# Altium PCB PCB1.PcbDoc
Units mil, origin at the board's own origin, x right, y up, seen from the top; angles counter-clockwise.
Board outline 6000 x 4000 mil, 2 copper layers (Top Layer, Bottom Layer); 11 components, 7 nets, 55 pads, 0 vias.
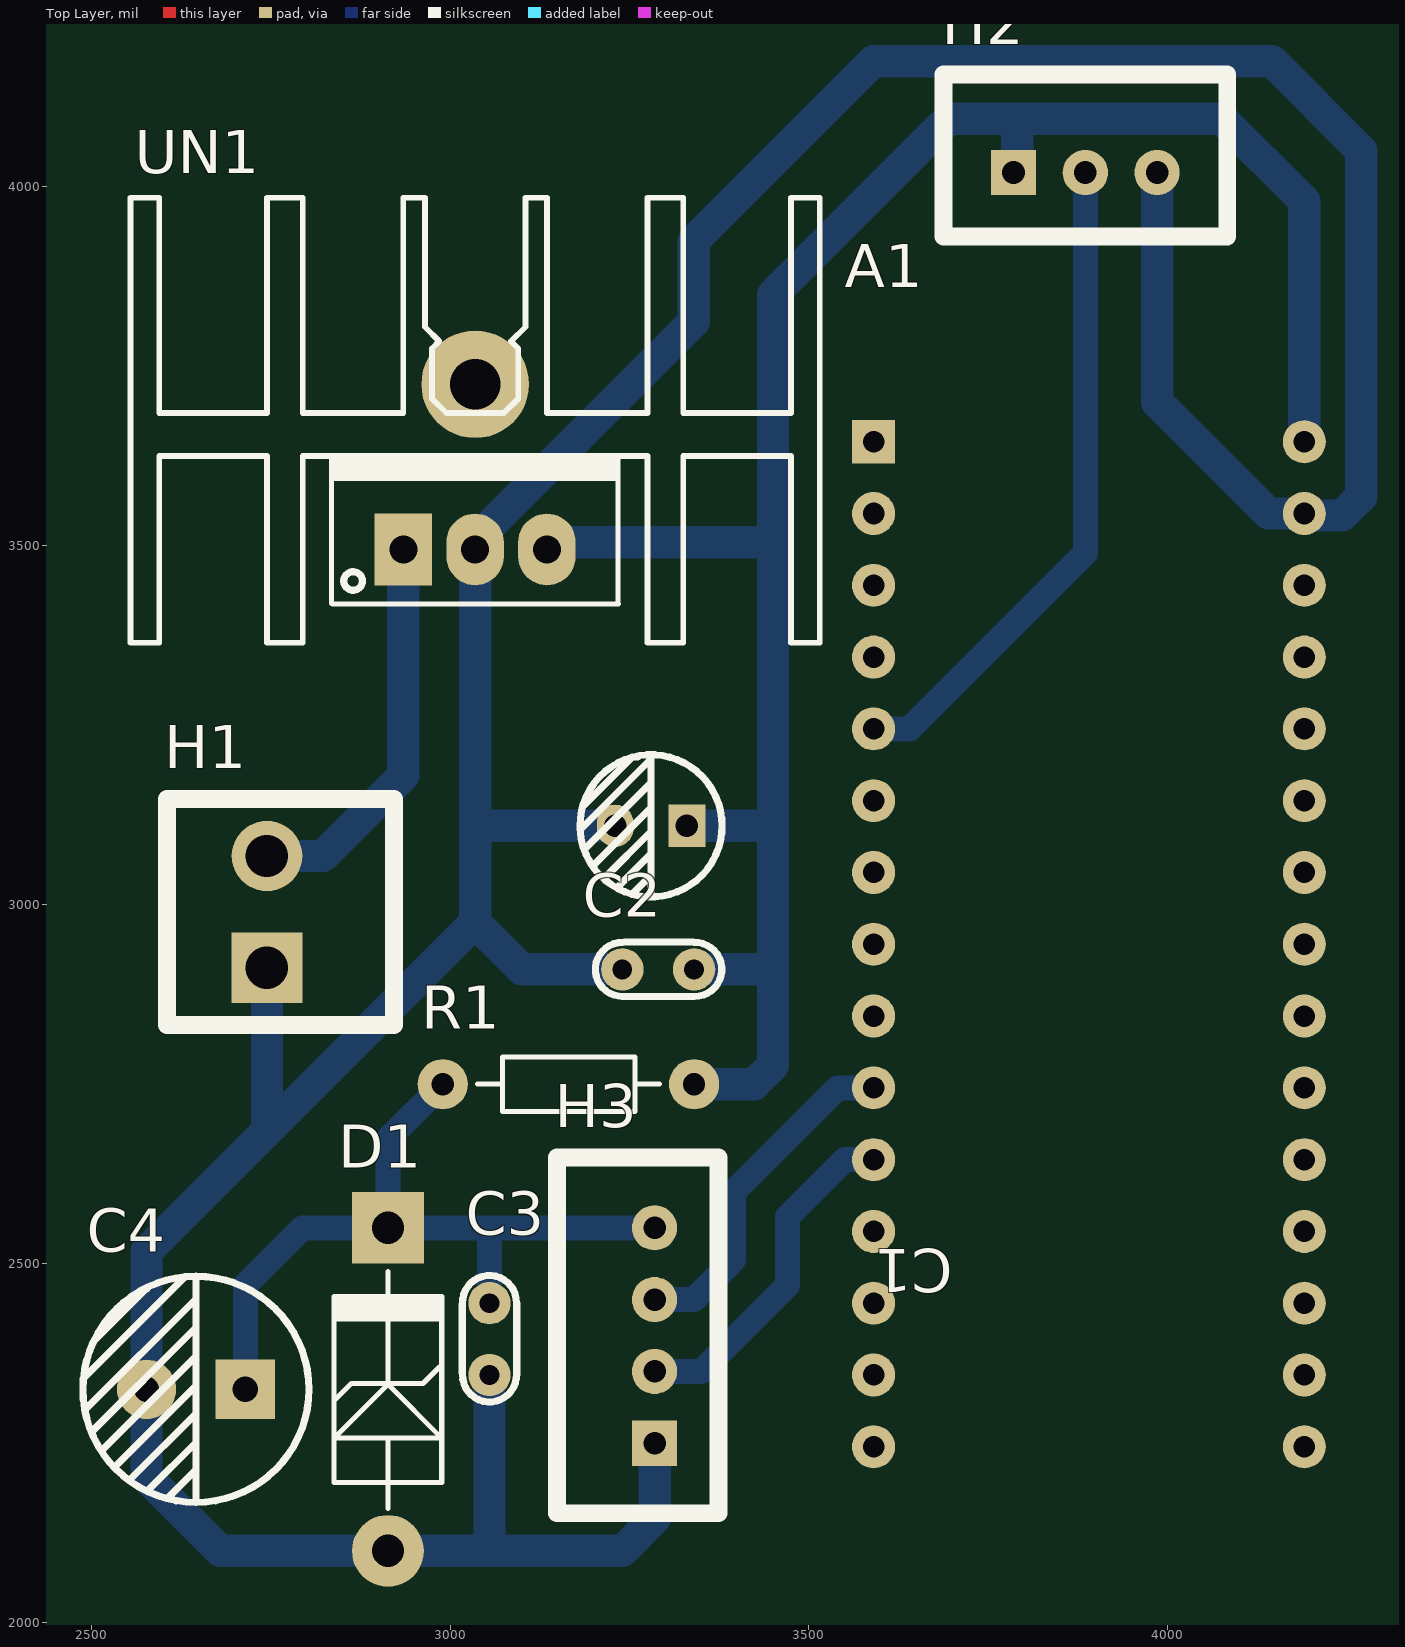
[diagram p0: Top Layer view]
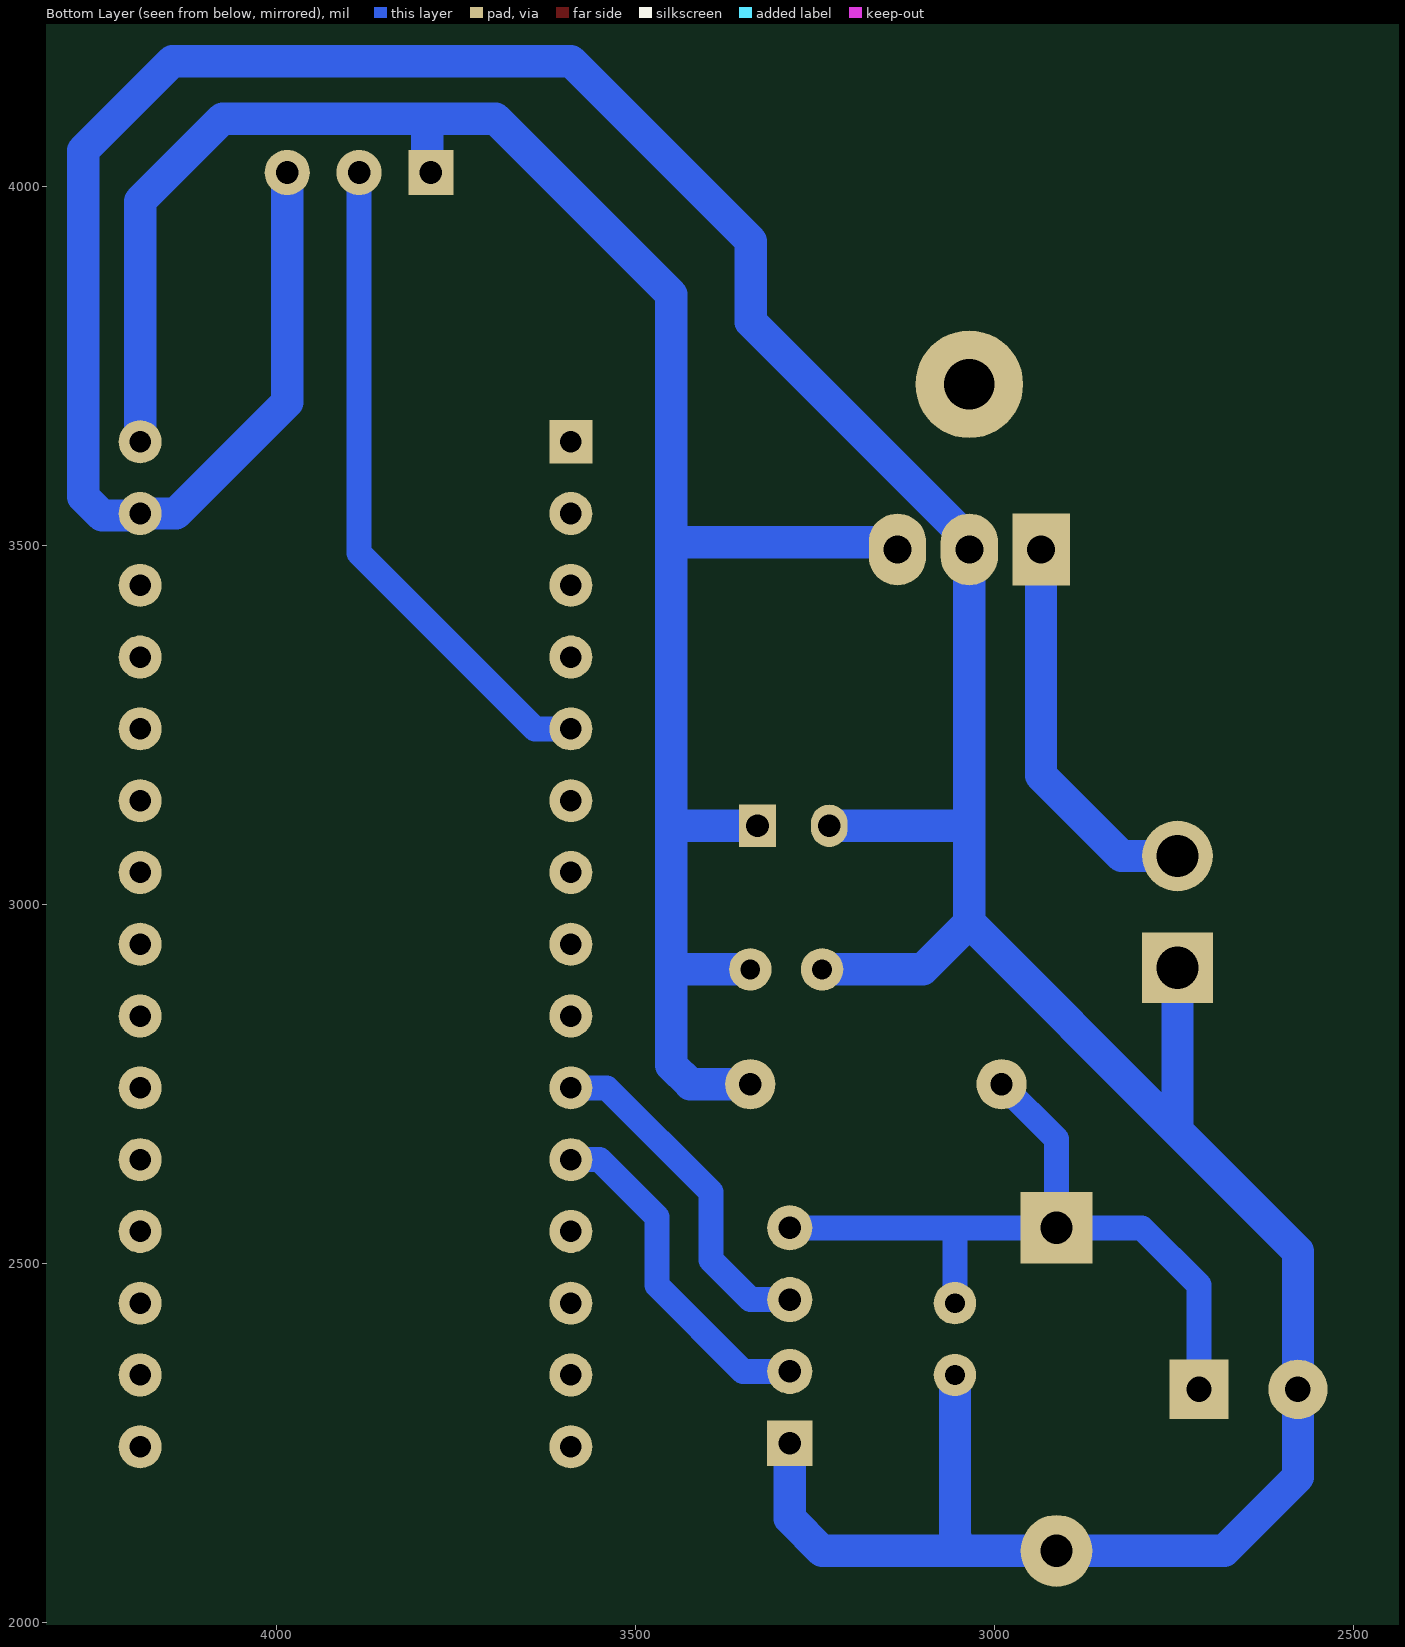
[diagram p1: Bottom Layer view, seen from below]
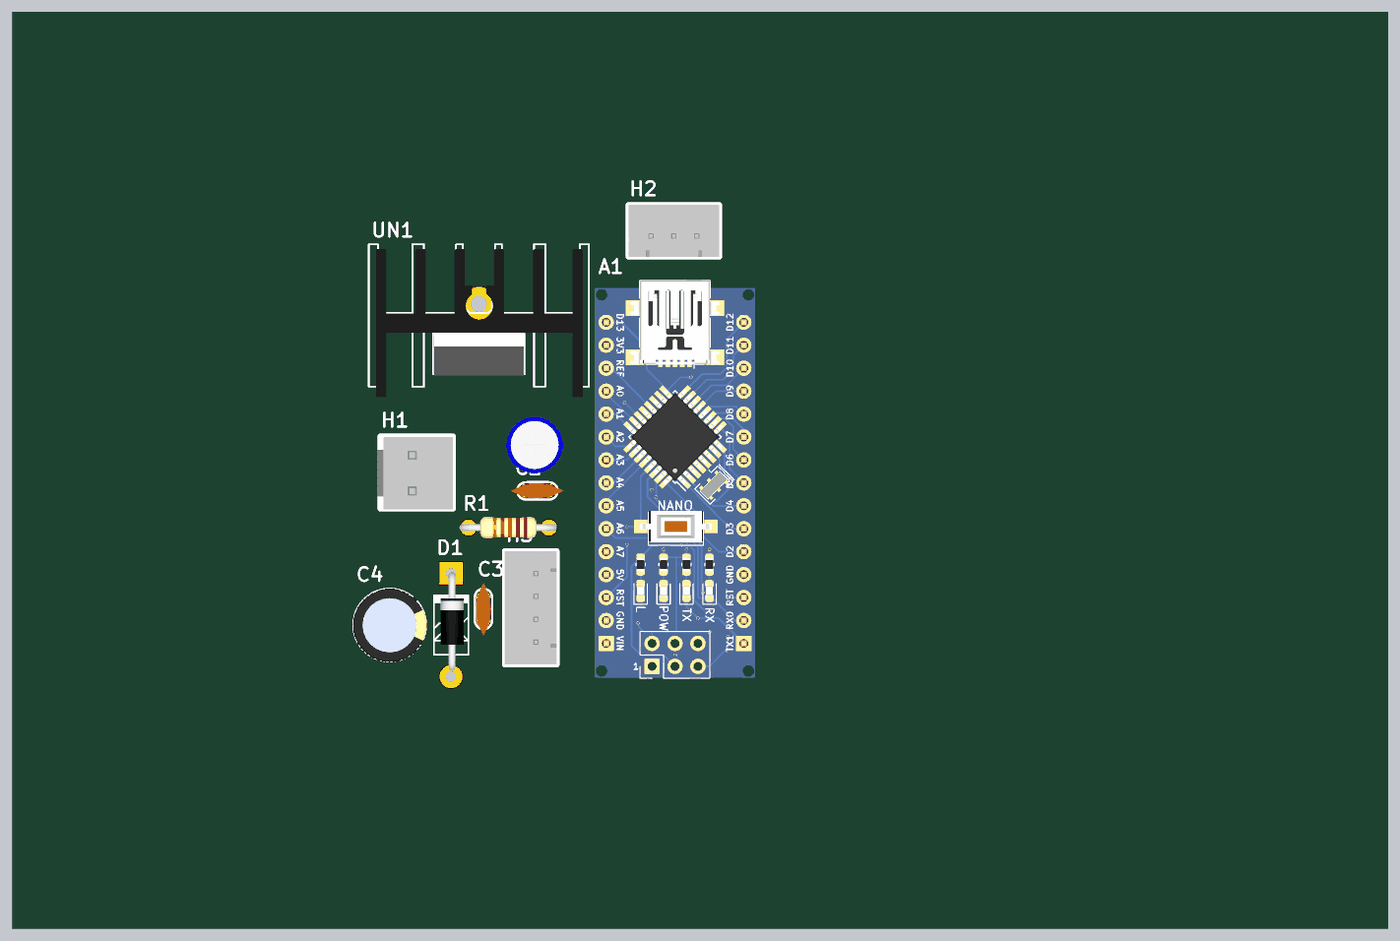
[diagram p2: 3D render of the assembled board from above, using the file's embedded part models]

## Layer stack, top to bottom
Top Solder: solder mask 0.4, Solder Resist, Dk 3.5
Top Layer: signal copper 1.4
Dielectric 1: dielectric 12.6, FR-4, Dk 4.8
Bottom Layer: signal copper 1.4
Bottom Solder: solder mask 0.4, Solder Resist, Dk 3.5

## Board outline
1000,1000 7000,1000 7000,5000 1000,5000

## Design rules (kind name [scope] priority, off if disabled: settings)
Clearance [All] p1: gap=10 ignorepadtopadclearanceinfootprint=FALSE except(0: Arc-Hole Track-Hole SMDPad-Hole THPad-Hole Via-Hole Fill-Hole Poly-Hole Region-Hole Text-Hole)
PolygonConnect [All] p1: connectstyle=Relief reliefconductorwidth=10 reliefentries=4 polygonreliefangle="90 Angle" airgapwidth=10
RoutingVias [All] p1: holewidth=28 width=50 viastyle="Through Hole" minholewidth=28 minwidth=50 maxholewidth=28 maxwidth=50
SolderMaskExpansion [All] p1: expansion=4
Width GND [InNet('GND')] p1: maxlimit=55 minlimit=45 preferedwidth=50
Width VCC [InNet('+5')] p2: maxlimit=55 minlimit=45 preferedwidth=50
Width net [All] p3: maxlimit=45 minlimit=35 preferedwidth=40
Width [All] p4: maxlimit=10 minlimit=10 preferedwidth=10
30 further rules are at their usual default settings.

## Components (designator, comment, footprint, x,y, rotation, side; value= is the part's Value field where it differs from the comment)
A1 "Nano" "Arduino nano" 3530,3805 r270 top
C1 "100uF" "tu hoa 5mm" 3280,3110 r180 top
C2 "103" "tu gom" 3290,2910 r180 top
C3 "103" "tu gom" 3055,2395 r270 top
C4 "4.7uF" "tu hoa 8mm" 2646.1,2325 r180 top
D1 "3V3" DZ2A 2913.49,2550 r270 top value=3v3
H1 "Header 2P VH3.96 Duc Thang" VH3.96M-2 2745,2990 r90 top
H2 "Header 3P 2.54 Duc Thang" XH2.54M-3 3785,4020 r0 top
H3 "CC2530" XH2.54M-4 3285,2250 r90 top
R1 "Res1" R1/4W 2990,2750 r0 top value=1K
UN1 "L78M05CP" QTO-220H2 3035,3495 r0 top

## Footprints (in the part's own frame and the unit in brackets; to place one, negate y for a bottom-side part, rotate by r counter-clockwise, add the part's x,y. Pads: shape width x height; smd on the part's side, far side on the other; paste and mask are expansions set on the pad)
"Arduino nano" [mil] "arduino nano"
  rect 60x60 hole 30: 0(160,60)
  round 60 hole 30: 1(260,60) 2(360,60) 3(460,60) 4(560,60) 5(660,60) 6(760,60) 7(860,60) 8(960,60) 9(1060,60) 10(1160,60) 11(1260,60) 12(1360,60) 13(1460,60) 14(1560,60) 15(1560,660) 16(1460,660) 17(1360,660) 18(1260,660) 19(1160,660) 20(1060,660) 21(960,660) 22(860,660) 23(760,660) 24(660,660) 25(560,660) 26(460,660) 27(360,660) 28(260,660) 29(160,660)
  body extent -25,10 1715,710, height 507
DZ2A [mil] "Diode 2A, W 150mil, L 450mil"
  round 100 hole 45: 1(450,0)
  rect 100x100 hole 45: 2(0,0)
  silkscreen extent 61,-75 391,75, body extent -5,-46 425,55, height 100
QTO-220H2 [mil] "TO-220 - 1-2-3"
  round 150 hole 70: 0(0,230)
  rect 80x100 hole 39: 1(-100,0)
  oval 80x100 hole 39: 2(0,0) 3(100,0)
  silkscreen extent -480,-130 480,490, body extent -449,-177 453,469, height 1206
R1/4W [mil] "R 1/4W, 2 Pin, 350mil"
  round 70 hole 31: 1(0,0) 2(350,0)
  silkscreen extent 48,-38 302,38, body extent -40,-47 386,47, height 111
"tu gom" [mm] "Tu gom mini"
  round 1.5 hole 0.7: 1(-1.27,0) 2(1.27,0)
  silkscreen extent -2.25,-0.97 2.22,0.97, body extent -2.92,-0.85 2.92,0.85, height 6.12
"tu hoa 5mm" [mm]
  rect 1.3x1.5 hole 0.8: 1(-1.27,0)
  oval 1.3x1.5 hole 0.8: 2(1.27,0)
  silkscreen extent -2.51,-2.51 2.51,2.51, body extent -3.12,-3.18 3.23,3.18, height 14.55
"tu hoa 8mm" [mm]
  rect 2.1x2.1 hole 0.9: 1(-1.75,0)
  round 2.1 hole 0.9: 2(1.75,0)
  silkscreen extent -4,-4 4,4, body extent -4.1,-4.07 4.1,4.13, height 13.81
VH3.96M-2 [mm]
  rect 2.5x2.5 hole 1.5: 1(-1.98,0)
  round 2.5 hole 1.5: 2(1.98,0)
  silkscreen extent -4,-4.5 4,3.54, body extent -4.08,-4.49 3.96,3.88, height 10.26
XH2.54M-3 [mm]
  rect 1.6x1.6 hole 0.8: 1(0,0)
  round 1.6 hole 0.8: 2(2.54,0) 3(5.08,0)
  silkscreen extent -2.48,-2.26 7.56,3.46, body extent -2.48,-2.26 7.56,3.48, height 6.91
XH2.54M-4 [mm]
  rect 1.6x1.6 hole 0.8: 1(0,0)
  round 1.6 hole 0.8: 2(2.54,0) 3(5.08,0) 4(7.62,0)
  silkscreen extent -2.48,-2.26 10.1,3.46, body extent -2.48,-2.26 10.1,3.48, height 6.91

## Part data
A1: library part "Arduino Nano"
C1: library part "Tu Hoa 100uF 16V 5x7", "C?m", Chung_Loai=C?m, Don_Vi=Con, Ma_Hang=MH001347, So_Chan=2, Ten_Linh_Kien="T? Hóa 100uF 16V 5x7MM"
C2 C3: library part "Tu gom 103 50V", "C?m", Chung_Loai=C?m, Don_Vi=Con, Ma_Hang=MH000936, So_Chan=2, Ten_Linh_Kien="T? g?m 103 10nF 50V"
C4: library part "Tu Hoa 4.7uF 400V 8x12", "C?m", Chung_Loai=C?m, Don_Vi=Con, Ma_Hang=MH003744, So_Chan=2, Ten_Linh_Kien="T? Hóa 4.7uF 400V 8x12MM"
D1: library part DZ, "Diode Zenner"
H1 H2: "C?m", Chung_Loai=C?m, Don_Vi=Con
  H1: Ma_Hang=MH001283, Ten_Linh_Kien="Header 2P XH2.54-2P Ð?c Th?ng"
  H2: Ma_Hang=MH001292, Ten_Linh_Kien="Header 3P XH2.54-3P Ð?c Th?ng"
H3: library part "Header 4P 2.54 Duc Thang", "C?m", Chung_Loai=C?m, Don_Vi=Con, Ma_Hang=MH001285, Ten_Linh_Kien="Header 4P XH2.54-4P Ð?c Th?ng"
R1: library part Res1_4, "Resistor", Manufacturer="Generic Components", Class=Passive, Published=08/06/2000, Publisher="Altium Hobart Technology Centre", SubClass=Resistor
UN1: "Positive Voltage Regulator", ComponentLink1Description="Manufacturer Link", ComponentLink1URL=http://www.st.com/, ComponentLink2Description=Datasheet, ComponentLink2URL=http://www.st.com/stonline/products/literature/ds/2146/l78m05c.pdf, DatasheetVersion=Apr-1994, LatestRevisionDate=17-Jul-2002, LatestRevisionNote="Re-released for DXP Platform.", Note="Tab is connected to pin 3 (GND).", PackageDescription="TO, Thru-Hole, Vertical, Heatsink Mounted; 3 In-Line Leads; Pitch 2.54 mm; Pin sequence 1, 3, 2", PackageReference=ISOWATT220AB, PackageVersion=Jul-1998, Published=24-Aug-2001, Publisher="Altium Limited"

## Nets (pads, with @x,y where several pads share a name; then routed paths per layer and width w, separated by ;. In a path a pad name is that pad's centre, name@x,y a point inside that pad or via, vN(x,y) a via of type N, cw(c..) or ccw(c..) an arc to the next point about the centre after c; other vN are vias at no path point)
3v3: C3.1 C4.1 D1.2 H3.4 R1.1 | length 1089.1
  Bottom Layer w35: C4.1 2715,2470.28 2794.72,2550 D1.2 ; R1.1 2913.49,2673.49 D1.2 ; C3.1 3055,2540 3065,2550 ; H3.4 3065,2550 ; D1.2 3065,2550
+5: A1.29 C1.1 C2.1 H2.1 R1.2 UN1.3 | length 3049
  Bottom Layer w45: UN1.3 3145,3505 3450,3505 ; C1.1 3440,3110 3450,3120 ; R1.2 3423.64,2750 3450,2776.36 3450,2910 ; C2.1 3450,2910 ; H2.1 3790,4025 3790,4095 ; A1.29 4190,3980 4075,4095 3790,4095 ; 3450,2910 3450,3120 ; 3450,3120 3450,3505 ; 3450,3505 3450,3850 3695,4095 3790,4095
Data: A1.4 H2.2 | length 926.5
  Bottom Layer w35: A1.4 3640,3245 3885,3490 H2.2
GND: A1.28 C1.2 C2.2 C3.2 C4.2 D1.1 H1.1 H2.3 H3.1 UN1.2 | length 6065.6
  Bottom Layer w45: H1.1 2745,2695 2750,2690 ; C3.2 3055,2115 3040,2100 ; C1.2 3045,3110 3035,3100 ; C2.2 3100,2910 3035,2975 ; H3.1 3285,2145 3240,2100 3040,2100 ; H2.3 3985,3700 4140,3545 A1.28 4192.87,3542.13 4242.87,3542.13 4269.23,3568.49 4269.23,4050.77 4145,4175 3590,4175 3339.36,3924.36 3339.36,3811.89 3035,3507.53 UN1.2 3035,3100 ; 2750,2690 2577.2,2517.2 C4.2 2577.2,2202.8 2680,2100 D1.1 3040,2100 ; 2750,2690 3035,2975 ; 3035,2975 3035,3100
NetH1_2: H1.2 UN1.1 | length 551.4
  Bottom Layer w45: H1.2 2822.95,3067.95 2935,3180 UN1.1
RX_cc2530: A1.10 H3.2 | length 482.8
  Bottom Layer w35: H3.2 3350,2350 3470,2470 3470,2565 3550,2645 A1.10
TX_cc2530: A1.9 H3.3 | length 482.8
  Bottom Layer w35: H3.3 3340,2450 3395,2505 3395,2600 3540,2745 A1.9
pads on no net: A1.0 A1.1 A1.2 A1.3 A1.5 A1.6 A1.7 A1.8 A1.11 A1.12 A1.13 A1.14 A1.15 A1.16 A1.17 A1.18 A1.19 A1.20 A1.21 A1.22 A1.23 A1.24 A1.25 A1.26 A1.27 UN1.0